# Altium PCB transmitter rev2.PcbDoc
Units mil, origin at the board's own origin, x right, y up, seen from the top; angles counter-clockwise.
Board outline 5725 x 2841.12 mil, 2 copper layers (Top Layer, Bottom Layer); 8 components, 15 nets, 77 pads, 11 vias.
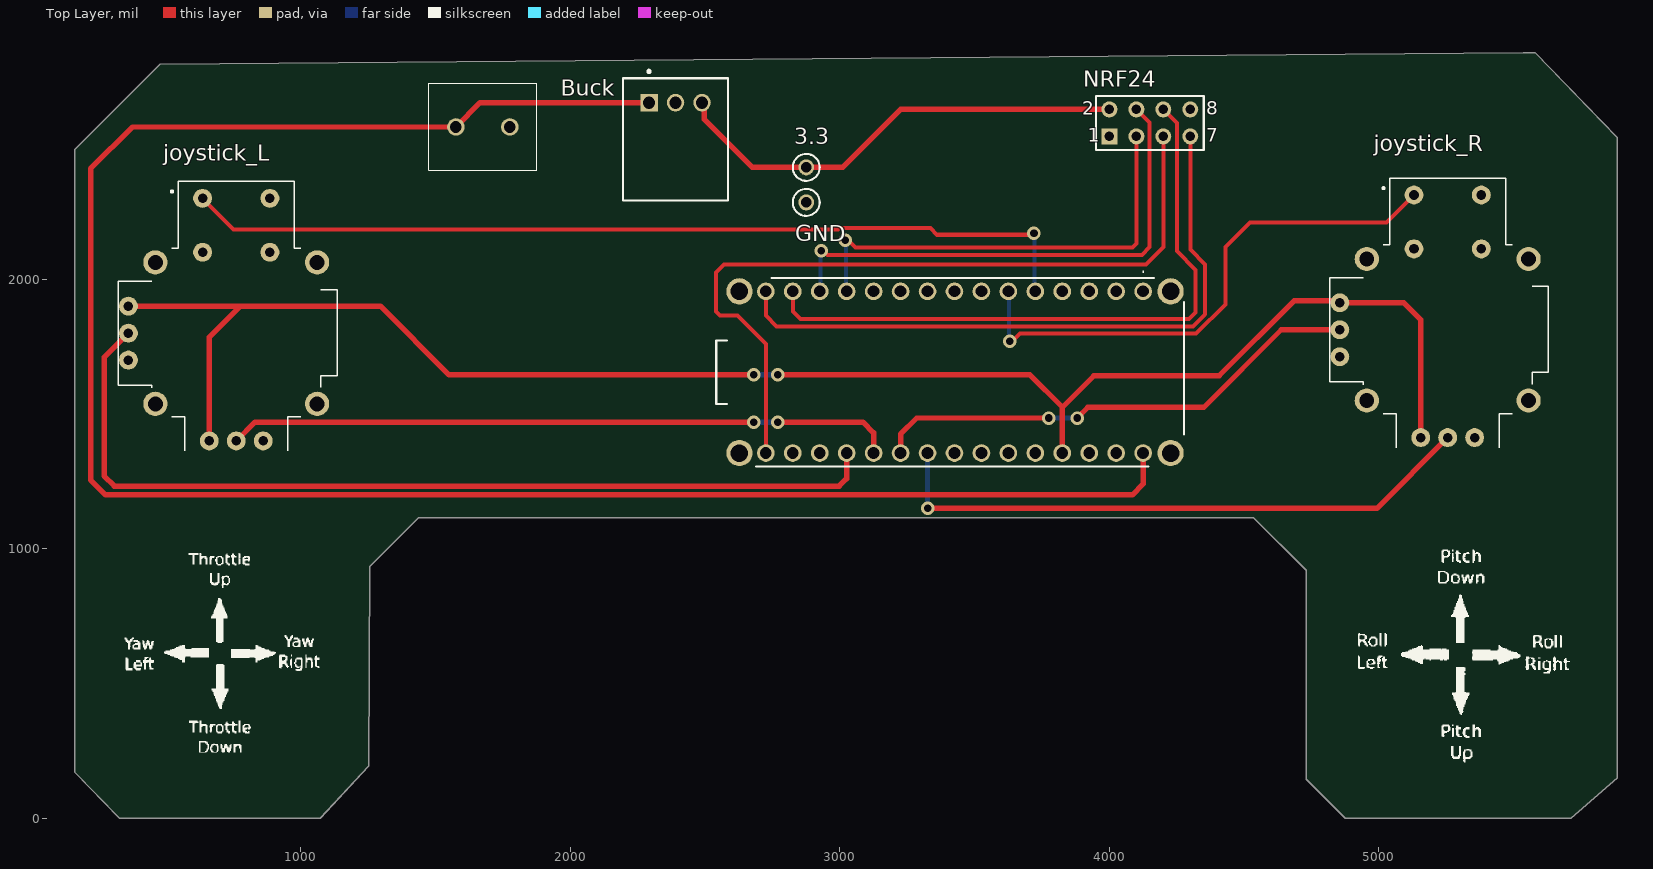
[diagram p0: Top Layer view]
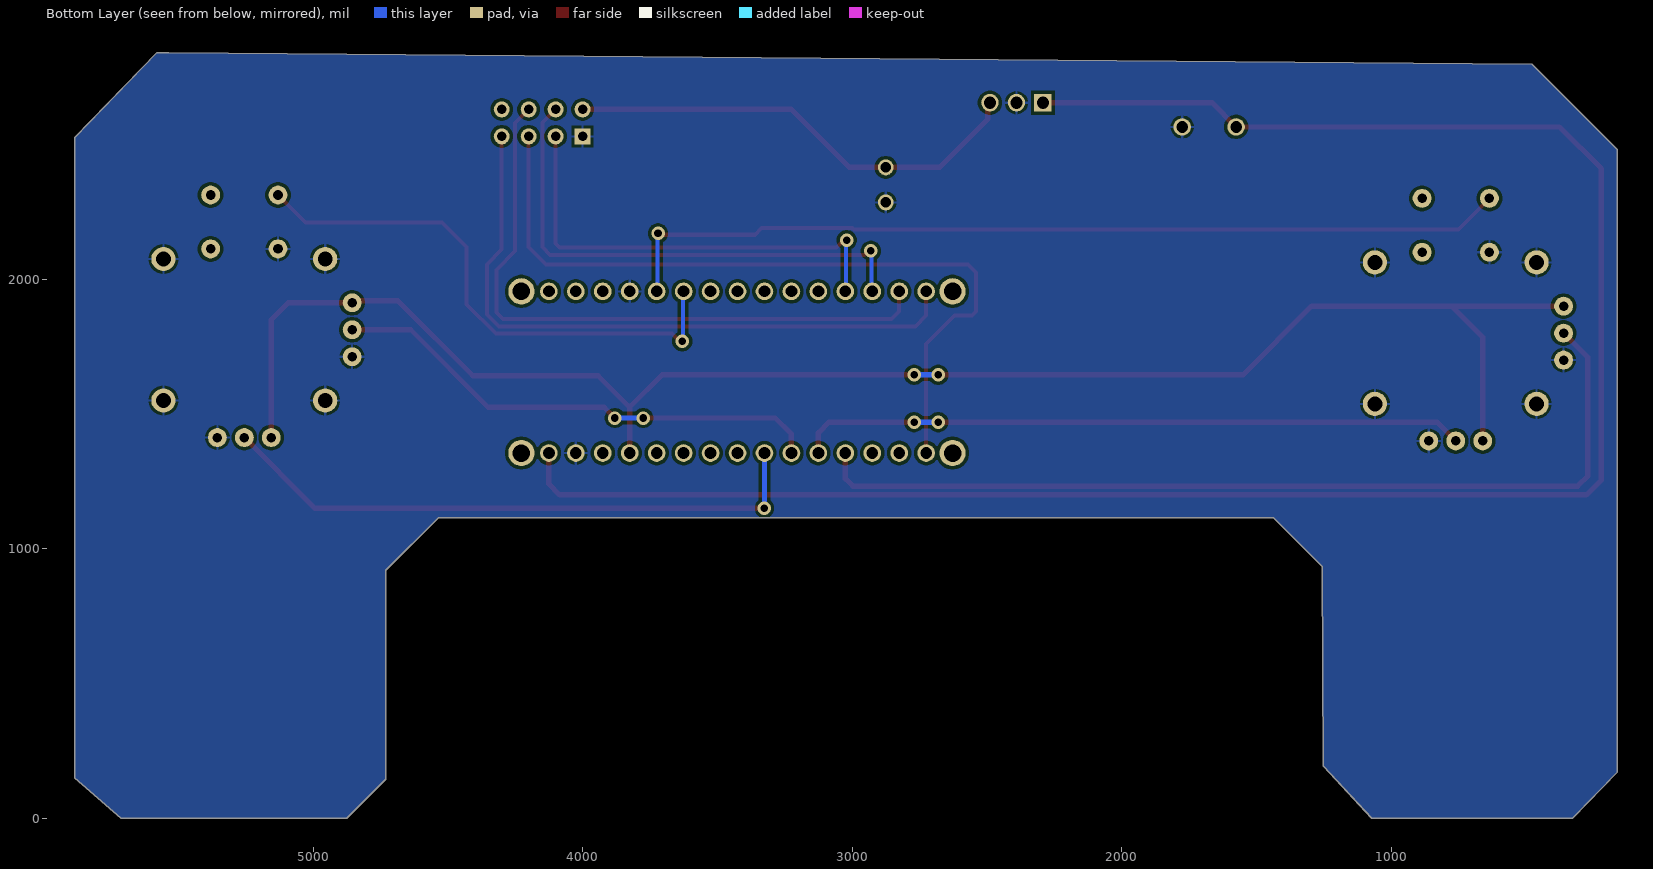
[diagram p1: Bottom Layer view, seen from below]

## Layer stack, top to bottom
Top Solder: solder mask 0.4, Solder Resist, Dk 3.5
Top Layer: signal copper 1.4
Dielectric 1: dielectric 12.6, FR-4, Dk 4.8
Bottom Layer: signal copper 1.4
Bottom Solder: solder mask 0.4, Solder Resist, Dk 3.5

## Board outline
477.86,2798.49 5534.91,2841.12 5578.88,2841.12 5885,2525 5885,150.32 5712.68,0 4875,0 4730,145 4730,920 4535,1115 1436.54,1115 1255.16,933.62 1251.04,192.89 1071.64,0 327.18,0 160,171.58 160,2480.63

## Design rules (kind name [scope] priority, off if disabled: settings)
Clearance [All] p1: gap=12 ignorepadtopadclearanceinfootprint=FALSE except(0: Arc-Hole Track-Hole SMDPad-Hole THPad-Hole Via-Hole Fill-Hole Poly-Hole Region-Hole Text-Hole)
PolygonConnect [All] p1: connectstyle=Relief reliefconductorwidth=10 reliefentries=4 polygonreliefangle="90 Angle" airgapwidth=10
RoutingVias [All] p1: holewidth=28 width=50 viastyle="Through Hole" minholewidth=28 minwidth=50 maxholewidth=28 maxwidth=50
SolderMaskExpansion [All] p1: expansion=4 istentingtop=FALSE
Width [All] p1: maxlimit=20 minlimit=10 preferedwidth=15 minimp=50.000000 maximp=50.000000 favimp=50.000000
30 further rules are at their usual default settings.

## Classes and differential pairs
component class "transmitter rev2": 3.3 Buck GND

## Components (designator, comment, footprint, x,y, rotation, side; value= is the part's Value field where it differs from the comment)
3.3 "5003" KSTN-5003 2875,2415 r0 top
B? "ABX00053" ABX00053 4125,1955 r270 top
Buck "S3B-XH-A(LF)(SN)" JST-S3B-XH-A(LF)(SN)_V 2390,2655 r0 top
GND "5003" KSTN-5003 2875,2285 r0 top
J? "282837-2" 2828372 1575,2565 r0 top
joystick_L "COM-09032" XDCR_COM-09032 760,1800 r0 top (schematic designator joystick_L?)
joystick_R "COM-09032" XDCR_COM-09032 5255,1812.5 r0 top (schematic designator joystick_R?)
NRF24 "Header 4X2" HDR2X4 4000,2530 r0 top (schematic designator NRF?)

## Footprints (in the part's own frame and the unit in brackets; to place one, negate y for a bottom-side part, rotate by r counter-clockwise, add the part's x,y. Pads: shape width x height; smd on the part's side, far side on the other; paste and mask are expansions set on the pad)
2828372 [mm]
  round 1.65 hole 1.1: 1(0,0) 2(5.08,0)
  silkscreen extent -2.54,-4.1 7.62,4.1
ABX00053 [mm]
  round 1.665 hole 1.11: 1(0,0) 2(0,-2.54) 3(0,-5.08) 4(0,-7.62) 5(0,-10.16) 6(0,-12.7) 7(0,-15.24) 8(0,-17.78) 9(0,-20.32) 10(0,-22.86) 11(0,-25.4) 12(0,-27.94) 13(0,-30.48) 14(0,-33.02) 15(0,-35.56) 16(15.24,-35.56) 17(15.24,-33.02) 18(15.24,-30.48) 19(15.24,-27.94) 20(15.24,-25.4) 21(15.24,-22.86) 22(15.24,-20.32) 23(15.24,-17.78) 24(15.24,-15.24) 25(15.24,-12.7) 26(15.24,-10.16) 27(15.24,-7.62) 28(15.24,-5.08) 29(15.24,-2.54) 30(15.24,0)
  round 2.475 hole 1.65: MH1(0,2.59) MH2(15.24,2.59) MH3(0,-38.05) MH4(15.24,-38.05)
  silkscreen extent -1.9,-40.23 16.5,3.86
HDR2X4 [mm] "Connector; Header; 4x2 Position"
  rect 1.5x1.5 hole 0.9: 1(0,0)
  round 1.5 hole 0.9: 2(0,2.54) 3(2.54,0) 4(2.54,2.54) 5(5.08,0) 6(5.08,2.54) 7(7.62,0) 8(7.62,2.54)
  silkscreen extent -1.27,-1.27 8.89,3.81
JST-S3B-XH-A(LF)(SN)_V [mm] "Header, 3-Leads, Body 9.9x11.5mm, Pitch 2.5mm"
  rect 1.65x1.65 hole 1.15: 1(-2.5,0)
  round 1.65 hole 1.15: 2(0,0) 3(2.5,0)
  silkscreen extent -4.95,-9.2 4.95,3.08, body extent -4.95,-9.2 4.95,2.3, height 6.15
KSTN-5003 [mm] "Test Point, Through Hole, Dia 2.54mm"
  round 1.5 hole 1: 1(0,0)
  silkscreen extent -1.27,-1.27 1.27,1.27, body extent -1.27,-1.27 1.27,1.27, height 4.57
XDCR_COM-09032 [mil]
  round 70 hole 35.43: B1A(-125,500) B1B(125,500) B2A(-125,300) B2B(125,300)
  round 70 hole 35: H1(-100,-400) H2(0,-400) H3(100,-400) V1(-400,100) V2(-400,0) V3(-400,-100)
  round 90 hole 55: S1(-300,262.5) S2(-300,-262.5) S3(300,-262.5) S4(300,262.5)
  silkscreen extent -437,-437 374,563

## Part data
3.3 GND: library part CMP-002-00037-2, "Test Point, Orange, Height 4.6 mm, Tail Length 3 mm, 1-Pin THD, RoHS", Colour=Orange, Manufacturer=Keystone, Package Description="1-Pin Through Hole Device, Dia 2.54 mm", Package Quantity=10, Case/Package=5003, Connector Type=TestPoint, Contact Material=Bronze, Contact Plating=Tin, Datasheet URL=http://keyelco.com/userAssets/file/M65p56.pdf, Datasheet Version=Jun-15, Diameter=2.54mm, Manufacturer URL=http://www.keyelco.com/, Mounting Technology=TH, Package Reference=5003, Packaging=Bulk, Pins=1, RoHS Compliant=True
B?: "Development Boards & Kits - AVR Arduino Nano RP2040 Connect with header", Manufacturer_Name=Arduino, Mouser Part Number=782-ABX00053, Arrow Part Number=ABX00053, Arrow Price/Stock=https://www.arrow.com/en/products/abx00053/arduino-corporation?region=nac, Datasheet Link=https://content.arduino.cc/assets/ABX00053-datasheet.pdf, Geometry.Height=3.25mm, Manufacturer_Part_Number=ABX00053, Mouser Price/Stock=https://www.mouser.co.uk/ProductDetail/Arduino/ABX00053?qs=iLbezkQI%252Bsj092HEuR%252Bsvg%3D%3D
Buck: library part CMP-002-00033-2, "Male Header, Pitch 2.5 mm, 1 x 3 Position, Height 6.1 mm, Tail Length 3.4 mm, -25 to 85 degC, RoHS, Bulk", Manufacturer=JST, Max Operating Temperature=85°C, Min Operating Temperature=-25°C, Package Description="Male Header, Pitch 2.5 mm, 1 x 3 Position, Height 6.1 mm, Tail Length 3.4 mm", Case/Package=S3B-XH-A(LF)(SN), Connector Type=Header, Datasheet URL=http://www.jst-mfg.com/product/pdf/eng/eXH.pdf, Datasheet Version=May-16, Gender=Male, Manufacturer URL=http://www.jst.com/home2.html, Mounting Technology=TH, Package Reference=S3B-XH-A(LF)(SN), RoHS Compliant=Unknown
J?: "Fixed Terminal Blocks 5.08MM PCB MOUNT 2P", Manufacturer_Name="TE Connectivity", Mouser Part Number=571-2828372, Arrow Part Number=282837-2, Arrow Price/Stock=https://www.arrow.com/en/products/282837-2/te-connectivity?region=europe, Datasheet Link=https://www.te.com/commerce/DocumentDelivery/DDEController?Action=srchrtrv&DocNm=282837&DocType=Customer+Drawing&DocLang=English&DocFormat=pdf&PartCntxt=282837-2, Geometry.Height=10.3mm, Manufacturer_Part_Number=282837-2, Mouser Price/Stock=https://www.mouser.co.uk/ProductDetail/TE-Connectivity/282837-2?qs=A%252Bip%252BNCYi6O2H0NGWOeAxg%3D%3D
joystick_L joystick_R: "Thumb Joystick", Package=None, Availability=Unavailable, MP=COM-09032, Price=None
NRF24: "Header, 4-Pin, Dual row", LatestRevisionDate=17-Jul-2002, LatestRevisionNote="Re-released for DXP Platform.", Publisher="Altium Limited"

## Via types
v1: diameter 50, hole 28, Top Layer to Bottom Layer, 11 vias

## Nets (pads, with @x,y where several pads share a name; then routed paths per layer and width w, separated by ;. In a path a pad name is that pad's centre, name@x,y a point inside that pad or via, vN(x,y) a via of type N, cw(c..) or ccw(c..) an arc to the next point about the centre after c; other vN are vias at no path point)
3.3V: 3.3.1 Buck.3 NRF24.2 | length 1731.3
  Top Layer w20: Buck.3 2497.03,2646.4 2497.03,2592.97 2675,2415 3.3.1 3010,2415 3225,2630 NRF24.2
+5: B?.27 joystick_L.H1 joystick_L.V1 joystick_R.H1 joystick_R.V1 | length 6298.1
  Top Layer w20: joystick_L.V1 775,1900 ; joystick_L.H1 660,1785 775,1900 ; v1(2680,1645) 1550,1645 1295,1900 775,1900 ; v1(2769.5,1645) 3705,1645 3825,1525 ; B?.27 3825,1525 ; joystick_R.H1 5155,1850 5092.5,1912.5 joystick_R.V1 4847.5,1920 4685,1920 4406.86,1641.86 3941.86,1641.86 3825,1525
  Bottom Layer w20: v1(2680,1645) v1(2769.5,1645)
GND: B?.4 B?.29 Buck.2 GND.1 J?.2 joystick_L.B2A joystick_L.H3 joystick_L.S1 joystick_L.S2 joystick_L.S3 joystick_L.S4 joystick_L.V3 joystick_R.B2A joystick_R.H3 joystick_R.S1 joystick_R.S2 joystick_R.S3 joystick_R.S4 joystick_R.V3 NRF24.1 | length 3.5
  Top Layer w20: NRF24.1@3997.5,2532.5 NRF24.1
hover: B?.5 joystick_L.B1A | length 3363.8
  Top Layer w15: joystick_L.B1A 750,2185 2993.4,2185 2997.9,2189.5 3336.3,2189.5 3360.8,2165 3715,2165 v1(3720,2170)
  Bottom Layer w15: v1(3720,2170) 3722.5,2167.5 3722.5,1957.5 B?.5
NetB?_6: B?.6 joystick_R.B1A | length 2036.7
  Top Layer w15: v1(3630,1770) 3639.47,1770 3667.47,1798 4321.18,1798 4430,1906.82 4430,2120 4520.99,2210.99 5028.49,2210.99 joystick_R.B1A
  Bottom Layer w15: B?.6 3627.5,1952.5 3627.5,1772.5 v1(3630,1770)
pitch: B?.21 joystick_R.V2 | length 1860.5
  Top Layer w20: B?.21 3225,1425 3285,1485 v1(3775,1485) ; v1(3880,1485) 3920,1525 4350,1525 4637.5,1812.5 joystick_R.V2
  Bottom Layer w20: v1(3775,1485) v1(3880,1485)
roll: B?.22 joystick_R.H2 | length 2243.7
  Top Layer w20: v1(3325,1150) 4992.5,1150 joystick_R.H2
  Bottom Layer w20: v1(3325,1150) B?.22
T_CE: B?.12 NRF24.3 | length 1687.9
  Top Layer w15: v1(3020,2145) 3029.47,2145 3057.47,2117 4085,2117 4100,2132 NRF24.3
  Bottom Layer w15: v1(3020,2145) 3022.5,2142.5 3022.5,1957.5 B?.12
T_CNS: B?.13 NRF24.4 | length 1920.6
  Top Layer w15: v1(2930,2105) 2939.47,2105 2954.47,2090 4120,2090 4149.03,2119.03 4149.03,2580.97 NRF24.4
  Bottom Layer w15: B?.13 2927.5,1957.5 2927.5,2102.5 v1(2930,2105)
T_MISO: B?.15 NRF24.7 | length 2438
  Top Layer w15: B?.15 2725,1865 2765,1825 4310,1825 4355,1870 4355,2055 4300,2110 NRF24.7
T_MOSI: B?.14 NRF24.6 | length 2394.7
  Top Layer w15: B?.14 2825,1880 2853,1852 4295,1852 4320,1877 4320,2035 4250.97,2104.03 4250.97,2579.03 NRF24.6
T_SCK: B?.16 NRF24.5 | length 2894.1
  Top Layer w15: B?.16 2725,1760 2620,1865 2555,1865 2540,1880 2540,2025 2570,2055 4135,2055 4200,2120 NRF24.5
throttle: B?.19 joystick_L.V2 | length 3444.6
  Top Layer w20: joystick_L.V2 270,1710 270,1270 308,1232 2997,1232 3025,1260 B?.19
V_IN: B?.30 Buck.1 J?.1 | length 7387.4
  Top Layer w20: Buck.1 1665,2655 J?.1 375,2565 220,2410 220,1255 275,1200 4085,1200 4125,1240 B?.30
yaw: B?.20 joystick_L.H2 | length 2485.6
  Top Layer w20: joystick_L.H2 830,1470 v1(2680,1470) ; v1(2770,1470) 3085,1470 3125,1430 B?.20
  Bottom Layer w20: v1(2680,1470) v1(2770,1470)
pads on no net: B?.1 B?.2 B?.3 B?.7 B?.8 B?.9 B?.10 B?.11 B?.17 B?.18 B?.23 B?.24 B?.25 B?.26 B?.28 B?.MH1 B?.MH2 B?.MH3 B?.MH4 joystick_L.B1B joystick_L.B2B joystick_R.B1B joystick_R.B2B NRF24.8

## Polygon pours and split planes (outlines as drawn)
GND on Bottom Layer "GND_L02_P002" (solid, pour order 2): 477.86,2798.49 5534.91,2841.12 5578.88,2841.12 5885,2525 5885,150.32 5712.68,0 4875,0 4730,145 4730,920 4535,1115 1436.54,1115 1255.16,933.62 1251.04,192.89 1071.64,0 327.18,0 160,171.58 160,2480.63

## Silkscreen, mask and mechanical layers (free items; w line width, h text height)
Top Overlay:
  drawing of 81 lines, arcs and shapes, not listed

## Text inside footprints (layer, text, board x,y; h text height)
NRF24: Top Overlay "2" at 3900,2610 h50; Top Overlay "1" at 3920,2510 h50; Top Overlay "7" at 4360,2510 h50; Top Overlay "8" at 4360,2610 h50